# Altium PCB Mixer_Loaded.PCBDOC (part 1 of 2)
Units mil, origin at the board's own origin, x right, y up, seen from the top; angles counter-clockwise.
Board outline 16350 x 11350 mil, 2 copper layers (Top Layer, Bottom Layer); 554 components, 386 nets, 1551 pads, 0 vias.
Unrouted connection lines stored in the file: 1047.
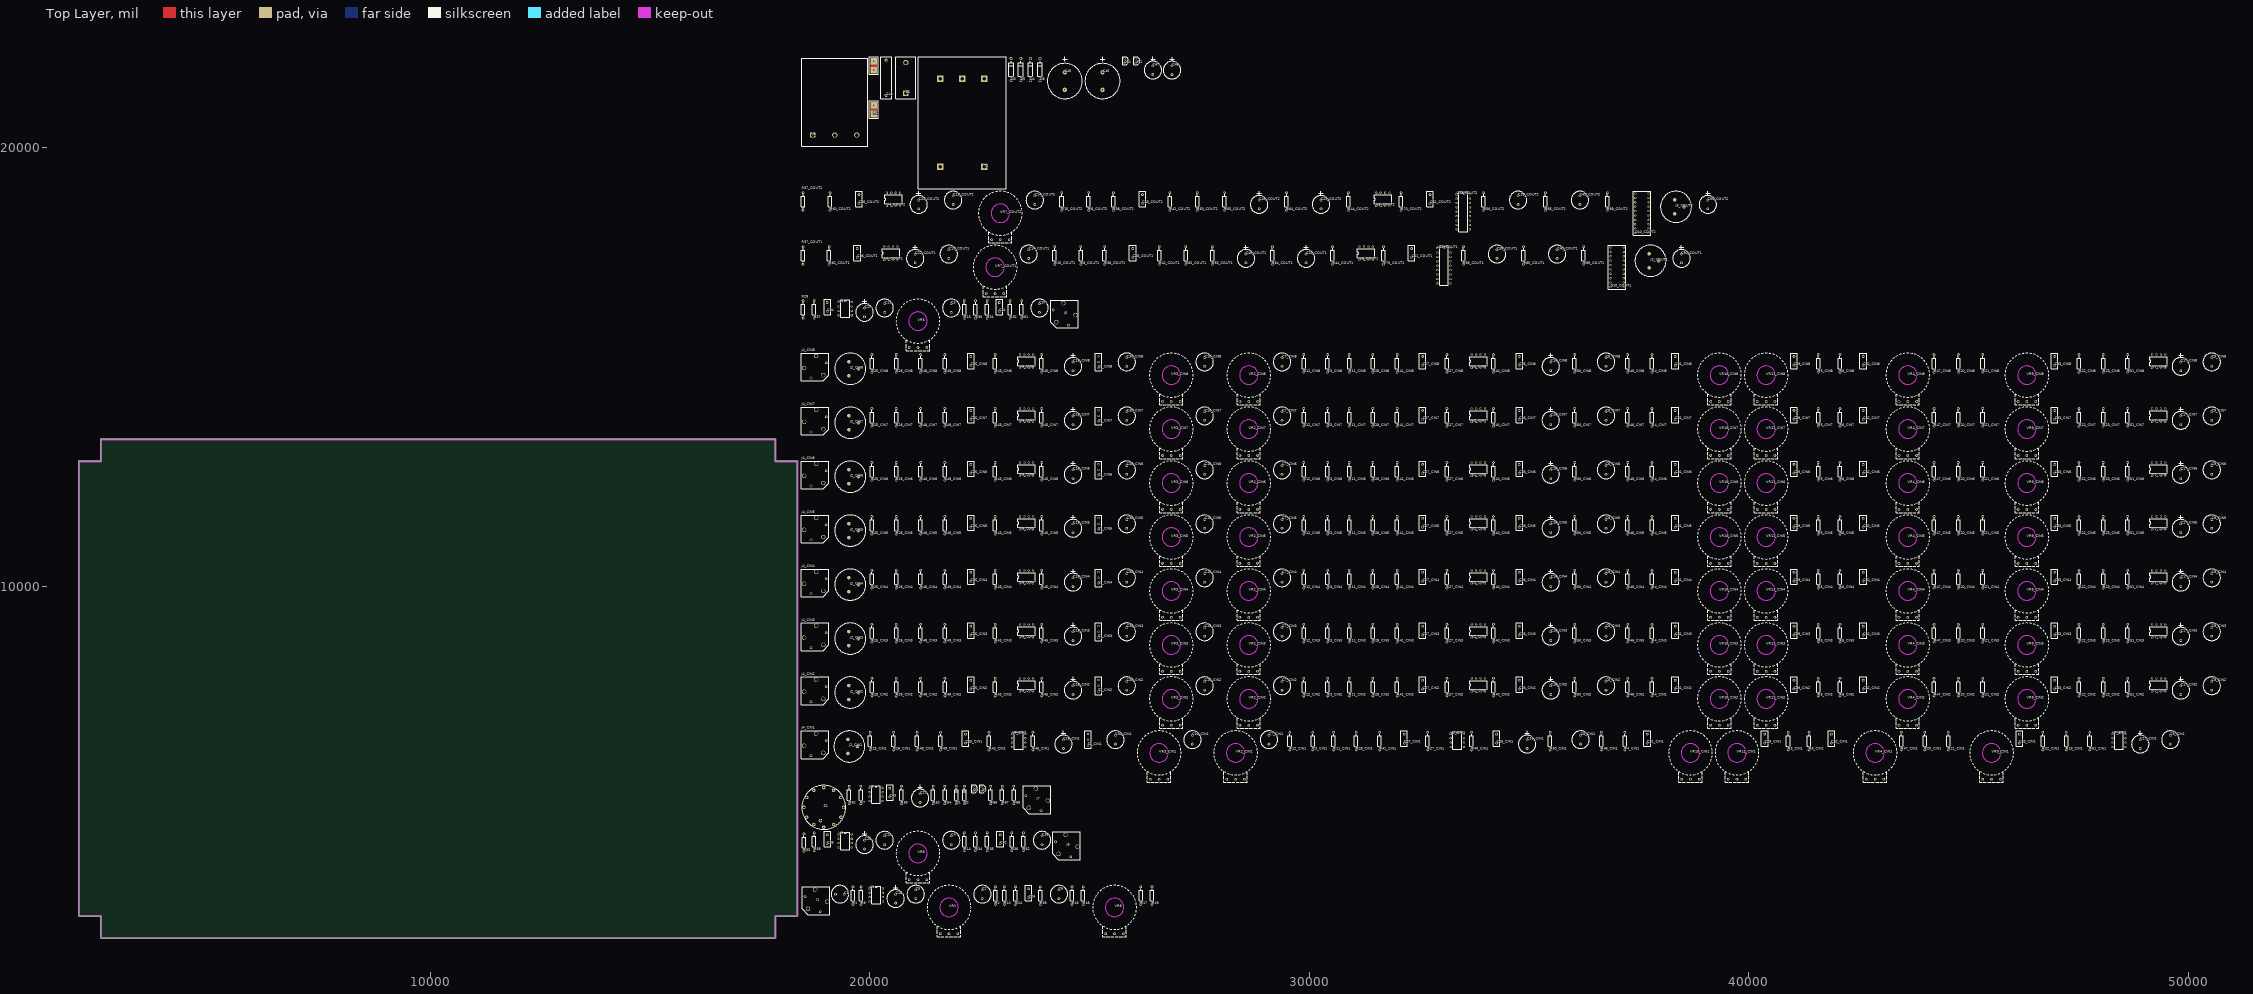
[diagram p0: Top Layer view]
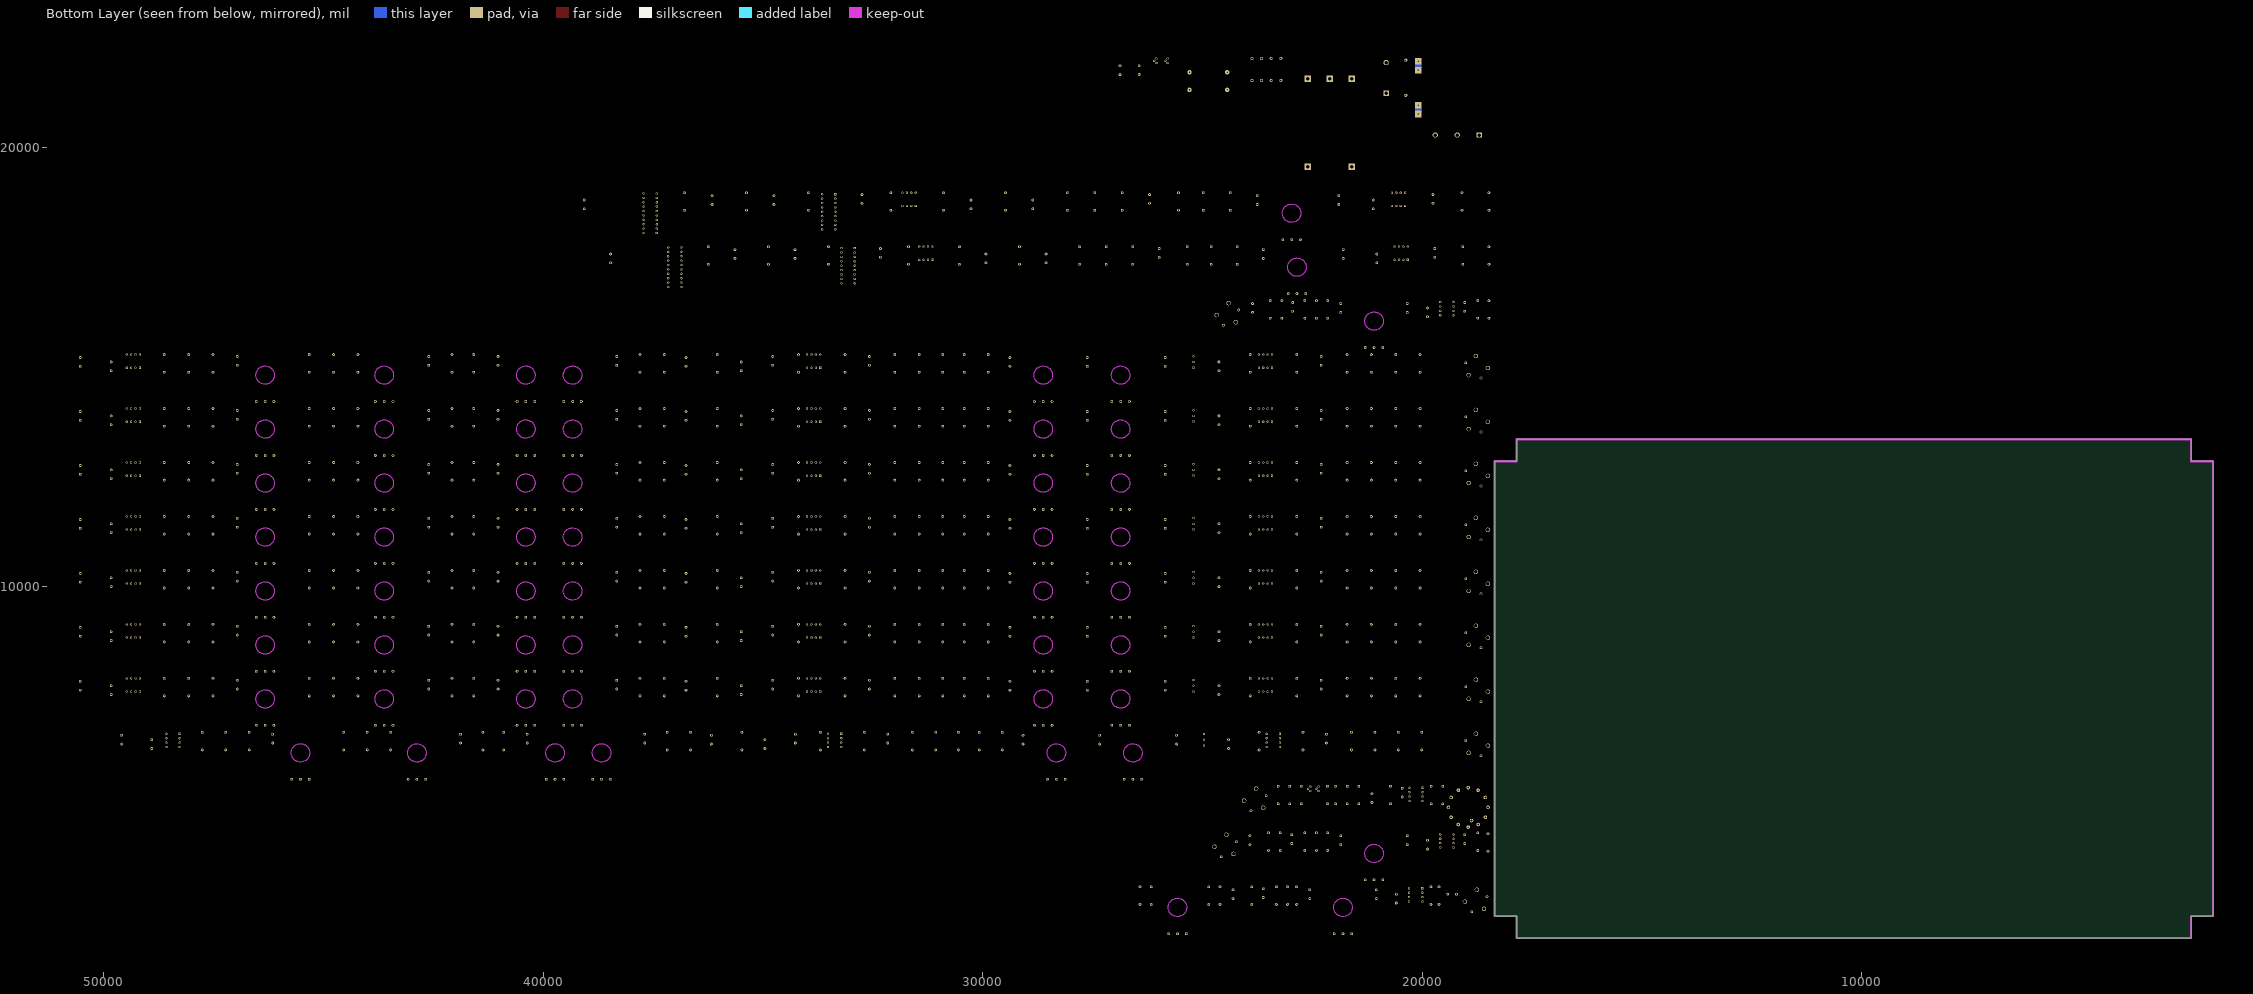
[diagram p1: Bottom Layer view, seen from below]

## Layer stack, top to bottom
Top Layer: signal copper 1.4
Dielectric: dielectric 12.6, FR-4, Dk 4.8
Bottom Layer: signal copper 1.4

## Board outline
2500,2000 17850,2000 17850,2500 18350,2500 18350,12850 17850,12850 17850,13350 2500,13350 2500,12850 2000,12850 2000,2500 2500,2500

## Design rules (kind name [scope] priority, off if disabled: settings)
Clearance [All] p1: gap=10
FabricationTestPointUsage TestPointUsage [All] p1: valid=0 allowmultiple=FALSE
FabricationTestpoint Testpoint [All] p1: side=3 testpointundercomponent=TRUE minsize=40 maxsize=100 preferedsize=60 minholesize=0 maxholesize=40 preferedholesize=32 testpointgrid=1 allowsidetop=TRUE allowsidebottom=TRUE usegrid=TRUE gridtolerance=0.01
PolygonConnect [All] p1: connectstyle=Relief reliefconductorwidth=10 reliefentries=4 polygonreliefangle="90 Angle"
RoomDefinition Auxilary [InComponentClass('Auxilary')] p1: confinementstyle=ConfineIn formatcopy=TRUE lockcomponents=FALSE outline 18425,2025 26579.51,2025 26579.51,3203 18425,3203
RoomDefinition CIN1 [InComponentClass('CIN1')] p2: confinementstyle=ConfineIn formatcopy=TRUE lockcomponents=FALSE outline 18425,5541 49972.36,5541 49972.36,6719 18425,6719
RoomDefinition CIN2 [InComponentClass('CIN2')] p3: confinementstyle=ConfineIn formatcopy=TRUE lockcomponents=FALSE outline 18425,6769 50934.91,6769 50934.91,7947 18425,7947
RoomDefinition CIN3 [InComponentClass('CIN3')] p4: confinementstyle=ConfineIn formatcopy=TRUE lockcomponents=FALSE outline 18425,7997 50934.91,7997 50934.91,9175 18425,9175
RoomDefinition CIN4 [InComponentClass('CIN4')] p5: confinementstyle=ConfineIn formatcopy=TRUE lockcomponents=FALSE outline 18425,9225 50934.91,9225 50934.91,10403 18425,10403
RoomDefinition CIN5 [InComponentClass('CIN5')] p6: confinementstyle=ConfineIn formatcopy=TRUE lockcomponents=FALSE outline 18425,10453 50934.91,10453 50934.91,11631 18425,11631
RoomDefinition CIN6 [InComponentClass('CIN6')] p7: confinementstyle=ConfineIn formatcopy=TRUE lockcomponents=FALSE outline 18425,11681 50934.91,11681 50934.91,12859 18425,12859
RoomDefinition CIN7 [InComponentClass('CIN7')] p8: confinementstyle=ConfineIn formatcopy=TRUE lockcomponents=FALSE outline 18425,12909 50934.91,12909 50934.91,14087 18425,14087
RoomDefinition CIN8 [InComponentClass('CIN8')] p9: confinementstyle=ConfineIn formatcopy=TRUE lockcomponents=FALSE outline 18425,14137 50934.91,14137 50934.91,15315 18425,15315
RoomDefinition COUT1 [InComponentClass('COUT1')] p10: confinementstyle=ConfineIn formatcopy=TRUE lockcomponents=FALSE outline 18425,16593 38977.41,16593 38977.41,17771 18425,17771
RoomDefinition COUT2 [InComponentClass('COUT2')] p11: confinementstyle=ConfineIn formatcopy=TRUE lockcomponents=FALSE outline 18425,17821 39597.21,17821 39597.21,18999 18425,18999
RoomDefinition Effects [InComponentClass('Effects')] p12: confinementstyle=ConfineIn formatcopy=TRUE lockcomponents=FALSE outline 18425,3253 24810.54,3253 24810.54,4431 18425,4431
RoomDefinition Headphone [InComponentClass('Headphone')] p13: confinementstyle=ConfineIn formatcopy=TRUE lockcomponents=FALSE outline 18425,4450 24133.46,4450 24133.46,5491 18425,5491
RoomDefinition Monitor [InComponentClass('Monitor')] p14: confinementstyle=ConfineIn formatcopy=TRUE lockcomponents=FALSE outline 18425,15365 24750.56,15365 24750.56,16543 18425,16543
RoomDefinition Power [InComponentClass('Power')] p15: confinementstyle=ConfineIn formatcopy=TRUE lockcomponents=FALSE outline 18425,19049 27101.73,19049 27101.73,22057 18425,22057
RoutingVias [All] p1: holewidth=28 width=50 viastyle="Through Hole" minholewidth=28 minwidth=50 maxholewidth=28 maxwidth=50
SilkscreenOverComponentPads [All] p1: minsilkscreentomaskgap=10
SolderMaskExpansion [All] p1: expansion=4
Width [All] p1: maxlimit=20 minlimit=8 preferedwidth=10
25 further rules are at their usual default settings.

## Classes and differential pairs
component class Auxilary: C1 C2 C5 C6 C15 C24 J1 R1 R2 R9 R10 R16 R17 R18 R19 R24 R39 U1 VR1 VR8
component class CIN1: C7_CIN1 C8_CIN1 C9_CIN1 C10_CIN1 C16_CIN1 C17_CIN1 C18_CIN1 C25_CIN1 C26_CIN1 C27_CIN1 C29_CIN1 C30_CIN1 C31_CIN1 C32_CIN1 C33_CIN1 J2_CIN1 J4_CIN1 R3_CIN1 R4_CIN1 R5_CIN1 R6_CIN1 R11_CIN1 R12_CIN1 R20_CIN1 R21_CIN1 R22_CIN1 R23_CIN1 R25_CIN1 R26_CIN1 R27_CIN1 R28_CIN1 R40_CIN1 R41_CIN1 R43_CIN1 R45_CIN1 R46_CIN1 R47_CIN1 R48_CIN1 R49_CIN1 R50_CIN1 R51_CIN1 S1_CIN1 U2_CIN1 U6_CIN1 U7_CIN1 VR2_CIN1 VR3_CIN1 VR4_CIN1 VR9_CIN1 VR10_CIN1 VR11_CIN1
component class CIN2: C7_CIN2 C8_CIN2 C9_CIN2 C10_CIN2 C16_CIN2 C17_CIN2 C18_CIN2 C25_CIN2 C26_CIN2 C27_CIN2 C29_CIN2 C30_CIN2 C31_CIN2 C32_CIN2 C33_CIN2 J2_CIN2 J4_CIN2 R3_CIN2 R4_CIN2 R5_CIN2 R6_CIN2 R11_CIN2 R12_CIN2 R20_CIN2 R21_CIN2 R22_CIN2 R23_CIN2 R25_CIN2 R26_CIN2 R27_CIN2 R28_CIN2 R40_CIN2 R41_CIN2 R43_CIN2 R45_CIN2 R46_CIN2 R47_CIN2 R48_CIN2 R49_CIN2 R50_CIN2 R51_CIN2 S1_CIN2 U2_CIN2 U6_CIN2 U7_CIN2 VR2_CIN2 VR3_CIN2 VR4_CIN2 VR9_CIN2 VR10_CIN2 VR11_CIN2
component class CIN3: C7_CIN3 C8_CIN3 C9_CIN3 C10_CIN3 C16_CIN3 C17_CIN3 C18_CIN3 C25_CIN3 C26_CIN3 C27_CIN3 C29_CIN3 C30_CIN3 C31_CIN3 C32_CIN3 C33_CIN3 J2_CIN3 J4_CIN3 R3_CIN3 R4_CIN3 R5_CIN3 R6_CIN3 R11_CIN3 R12_CIN3 R20_CIN3 R21_CIN3 R22_CIN3 R23_CIN3 R25_CIN3 R26_CIN3 R27_CIN3 R28_CIN3 R40_CIN3 R41_CIN3 R43_CIN3 R45_CIN3 R46_CIN3 R47_CIN3 R48_CIN3 R49_CIN3 R50_CIN3 R51_CIN3 S1_CIN3 U2_CIN3 U6_CIN3 U7_CIN3 VR2_CIN3 VR3_CIN3 VR4_CIN3 VR9_CIN3 VR10_CIN3 VR11_CIN3
component class CIN4: C7_CIN4 C8_CIN4 C9_CIN4 C10_CIN4 C16_CIN4 C17_CIN4 C18_CIN4 C25_CIN4 C26_CIN4 C27_CIN4 C29_CIN4 C30_CIN4 C31_CIN4 C32_CIN4 C33_CIN4 J2_CIN4 J4_CIN4 R3_CIN4 R4_CIN4 R5_CIN4 R6_CIN4 R11_CIN4 R12_CIN4 R20_CIN4 R21_CIN4 R22_CIN4 R23_CIN4 R25_CIN4 R26_CIN4 R27_CIN4 R28_CIN4 R40_CIN4 R41_CIN4 R43_CIN4 R45_CIN4 R46_CIN4 R47_CIN4 R48_CIN4 R49_CIN4 R50_CIN4 R51_CIN4 S1_CIN4 U2_CIN4 U6_CIN4 U7_CIN4 VR2_CIN4 VR3_CIN4 VR4_CIN4 VR9_CIN4 VR10_CIN4 VR11_CIN4
component class CIN5: C7_CIN5 C8_CIN5 C9_CIN5 C10_CIN5 C16_CIN5 C17_CIN5 C18_CIN5 C25_CIN5 C26_CIN5 C27_CIN5 C29_CIN5 C30_CIN5 C31_CIN5 C32_CIN5 C33_CIN5 J2_CIN5 J4_CIN5 R3_CIN5 R4_CIN5 R5_CIN5 R6_CIN5 R11_CIN5 R12_CIN5 R20_CIN5 R21_CIN5 R22_CIN5 R23_CIN5 R25_CIN5 R26_CIN5 R27_CIN5 R28_CIN5 R40_CIN5 R41_CIN5 R43_CIN5 R45_CIN5 R46_CIN5 R47_CIN5 R48_CIN5 R49_CIN5 R50_CIN5 R51_CIN5 S1_CIN5 U2_CIN5 U6_CIN5 U7_CIN5 VR2_CIN5 VR3_CIN5 VR4_CIN5 VR9_CIN5 VR10_CIN5 VR11_CIN5
component class CIN6: C7_CIN6 C8_CIN6 C9_CIN6 C10_CIN6 C16_CIN6 C17_CIN6 C18_CIN6 C25_CIN6 C26_CIN6 C27_CIN6 C29_CIN6 C30_CIN6 C31_CIN6 C32_CIN6 C33_CIN6 J2_CIN6 J4_CIN6 R3_CIN6 R4_CIN6 R5_CIN6 R6_CIN6 R11_CIN6 R12_CIN6 R20_CIN6 R21_CIN6 R22_CIN6 R23_CIN6 R25_CIN6 R26_CIN6 R27_CIN6 R28_CIN6 R40_CIN6 R41_CIN6 R43_CIN6 R45_CIN6 R46_CIN6 R47_CIN6 R48_CIN6 R49_CIN6 R50_CIN6 R51_CIN6 S1_CIN6 U2_CIN6 U6_CIN6 U7_CIN6 VR2_CIN6 VR3_CIN6 VR4_CIN6 VR9_CIN6 VR10_CIN6 VR11_CIN6
component class CIN7: C7_CIN7 C8_CIN7 C9_CIN7 C10_CIN7 C16_CIN7 C17_CIN7 C18_CIN7 C25_CIN7 C26_CIN7 C27_CIN7 C29_CIN7 C30_CIN7 C31_CIN7 C32_CIN7 C33_CIN7 J2_CIN7 J4_CIN7 R3_CIN7 R4_CIN7 R5_CIN7 R6_CIN7 R11_CIN7 R12_CIN7 R20_CIN7 R21_CIN7 R22_CIN7 R23_CIN7 R25_CIN7 R26_CIN7 R27_CIN7 R28_CIN7 R40_CIN7 R41_CIN7 R43_CIN7 R45_CIN7 R46_CIN7 R47_CIN7 R48_CIN7 R49_CIN7 R50_CIN7 R51_CIN7 S1_CIN7 U2_CIN7 U6_CIN7 U7_CIN7 VR2_CIN7 VR3_CIN7 VR4_CIN7 VR9_CIN7 VR10_CIN7 VR11_CIN7
component class CIN8: C7_CIN8 C8_CIN8 C9_CIN8 C10_CIN8 C16_CIN8 C17_CIN8 C18_CIN8 C25_CIN8 C26_CIN8 C27_CIN8 C29_CIN8 C30_CIN8 C31_CIN8 C32_CIN8 C33_CIN8 J2_CIN8 J4_CIN8 R3_CIN8 R4_CIN8 R5_CIN8 R6_CIN8 R11_CIN8 R12_CIN8 R20_CIN8 R21_CIN8 R22_CIN8 R23_CIN8 R25_CIN8 R26_CIN8 R27_CIN8 R28_CIN8 R40_CIN8 R41_CIN8 R43_CIN8 R45_CIN8 R46_CIN8 R47_CIN8 R48_CIN8 R49_CIN8 R50_CIN8 R51_CIN8 S1_CIN8 U2_CIN8 U6_CIN8 U7_CIN8 VR2_CIN8 VR3_CIN8 VR4_CIN8 VR9_CIN8 VR10_CIN8 VR11_CIN8
component class COUT1: C13_COUT1 C14_COUT1 C22_COUT1 C23_COUT1 C28_COUT1 C36_COUT1 C39_COUT1 C40_COUT1 C49_COUT1 C50_COUT1 C51_COUT1 D10_COUT1 J3_COUT1 R8_COUT1 R15_COUT1 R37_COUT1 R38_COUT1 R42_COUT1 R44_COUT1 R55_COUT1 R56_COUT1 R60_COUT1 R63_COUT1 R64_COUT1 R65_COUT1 R69_COUT1 R70_COUT1 U4_COUT1 U5_COUT1 U12_COUT1 VR7_COUT1
component class COUT2: C13_COUT2 C14_COUT2 C22_COUT2 C23_COUT2 C28_COUT2 C36_COUT2 C39_COUT2 C40_COUT2 C49_COUT2 C50_COUT2 C51_COUT2 D10_COUT2 J3_COUT2 R8_COUT2 R15_COUT2 R37_COUT2 R38_COUT2 R42_COUT2 R44_COUT2 R55_COUT2 R56_COUT2 R60_COUT2 R63_COUT2 R64_COUT2 R65_COUT2 R69_COUT2 R70_COUT2 U4_COUT2 U5_COUT2 U12_COUT2 VR7_COUT2
component class Effects: C4 C12 C20 C35 C38 C42 J6 R14 R33 R34 R35 R36 R58 R62 U3 VR6
component class Headphone: C21 C43 D1 D2 J7 Q1 Q2 R7 R52 R53 R54 R59 R66 R67 R68 S2 U9
component class Monitor: C3 C11 C19 C34 C37 C41 J5 R13 R29 R30 R31 R32 R57 R61 U8 VR5
component class Power: C44 C45 C46 C47 C48 D3 D4 D5 D6 F1 J8 S3 T1 U10 U11
net class HEADPHONE[1..8]: HEADPHONE1 HEADPHONE2 HEADPHONE3 HEADPHONE4 HEADPHONE5 HEADPHONE6 HEADPHONE7 HEADPHONE8
net class MB[1..2]: MB1 MB2
channel class "Input channel": CIN1 CIN2 CIN3 CIN4 CIN5 CIN6 CIN7 CIN8
channel class "Output channel": COUT1 COUT2

## Components (designator, comment, footprint, x,y, rotation, side; value= is the part's Value field where it differs from the comment)
C1 "1uF" RB.2/.4-NP 19417,2999 r0 top
C2 "1uF" RB.2/.4-NP 22558.94,3099 r90 top
C3 "1uF" RB.2/.4-NP 21851.84,16439 r90 top
C4 "1uF" RB.2/.4-NP 21851.84,4327 r90 top
C5 "2.2uF" RB.2/.4-NP 21042.94,3099 r90 top
C6 "2.2uF" RB.2/.4-NP 24301.71,3099 r90 top
C7_CIN1 "2.2uF" RB.2/.4-NP 29080.47,6615 r90 top (schematic designator C7)
C7_CIN2 "2.2uF" RB.2/.4-NP 29379.38,7843 r90 top (schematic designator C7)
C7_CIN3 "2.2uF" RB.2/.4-NP 29379.38,9071 r90 top (schematic designator C7)
C7_CIN4 "2.2uF" RB.2/.4-NP 29379.38,10299 r90 top (schematic designator C7)
C7_CIN5 "2.2uF" RB.2/.4-NP 29379.38,11527 r90 top (schematic designator C7)
C7_CIN6 "2.2uF" RB.2/.4-NP 29379.38,12755 r90 top (schematic designator C7)
C7_CIN7 "2.2uF" RB.2/.4-NP 29379.38,13983 r90 top (schematic designator C7)
C7_CIN8 "2.2uF" RB.2/.4-NP 29379.38,15211 r90 top (schematic designator C7)
C8_CIN1 "2.2uF" RB.2/.4-NP 36172.73,6615 r90 top (schematic designator C8)
C8_CIN2 "2.2uF" RB.2/.4-NP 36750.56,7843 r90 top (schematic designator C8)
C8_CIN3 "2.2uF" RB.2/.4-NP 36750.56,9071 r90 top (schematic designator C8)
C8_CIN4 "2.2uF" RB.2/.4-NP 36750.56,10299 r90 top (schematic designator C8)
C8_CIN5 "2.2uF" RB.2/.4-NP 36750.56,11527 r90 top (schematic designator C8)
C8_CIN6 "2.2uF" RB.2/.4-NP 36750.56,12755 r90 top (schematic designator C8)
C8_CIN7 "2.2uF" RB.2/.4-NP 36750.56,13983 r90 top (schematic designator C8)
C8_CIN8 "2.2uF" RB.2/.4-NP 36750.56,15211 r90 top (schematic designator C8)
C9_CIN1 "2.2uF" RB.2/.4-NP 49592.48,6615 r90 top (schematic designator C9)
C9_CIN2 "2.2uF" RB.2/.4-NP 50535.03,7843 r90 top (schematic designator C9)
C9_CIN3 "2.2uF" RB.2/.4-NP 50535.03,9071 r90 top (schematic designator C9)
C9_CIN4 "2.2uF" RB.2/.4-NP 50535.03,10299 r90 top (schematic designator C9)
C9_CIN5 "2.2uF" RB.2/.4-NP 50535.03,11527 r90 top (schematic designator C9)
C9_CIN6 "2.2uF" RB.2/.4-NP 50535.03,12755 r90 top (schematic designator C9)
C9_CIN7 "2.2uF" RB.2/.4-NP 50535.03,13983 r90 top (schematic designator C9)
C9_CIN8 "2.2uF" RB.2/.4-NP 50535.03,15211 r90 top (schematic designator C9)
C10_CIN1 "2.2uF" RB.2/.4-NP 27338.6,6615 r90 top (schematic designator C10)
C10_CIN2 "2.2uF" RB.2/.4-NP 27617.52,7843 r90 top (schematic designator C10)
C10_CIN3 "2.2uF" RB.2/.4-NP 27617.52,9071 r90 top (schematic designator C10)
C10_CIN4 "2.2uF" RB.2/.4-NP 27617.52,10299 r90 top (schematic designator C10)
C10_CIN5 "2.2uF" RB.2/.4-NP 27617.52,11527 r90 top (schematic designator C10)
C10_CIN6 "2.2uF" RB.2/.4-NP 27617.52,12755 r90 top (schematic designator C10)
C10_CIN7 "2.2uF" RB.2/.4-NP 27617.52,13983 r90 top (schematic designator C10)
C10_CIN8 "2.2uF" RB.2/.4-NP 27617.52,15211 r90 top (schematic designator C10)
C11 "2.2uF" RB.2/.4-NP 20335.84,16439 r90 top
C12 "2.2uF" RB.2/.4-NP 20335.84,4327 r90 top
C13_COUT1 "2.2uF" RB.2/.4-NP 21794.21,17667 r90 top (schematic designator C13)
C13_COUT2 "2.2uF" RB.2/.4-NP 21894.18,18895 r90 top (schematic designator C13)
C14_COUT1 "2.2uF" RB.2/.4-NP 23611.89,17667 r90 top (schematic designator C14)
C14_COUT2 "2.2uF" RB.2/.4-NP 23751.85,18895 r90 top (schematic designator C14)
C15 "10uF" RB.2/.4 20584.94,2999 r90 top
C16_CIN1 "10uF" RB.2/.4 34955.01,6515 r90 top (schematic designator C16)
C16_CIN2 "10uF" RB.2/.4 35492.85,7743 r90 top (schematic designator C16)
C16_CIN3 "10uF" RB.2/.4 35492.85,8971 r90 top (schematic designator C16)
C16_CIN4 "10uF" RB.2/.4 35492.85,10199 r90 top (schematic designator C16)
C16_CIN5 "10uF" RB.2/.4 35492.85,11427 r90 top (schematic designator C16)
C16_CIN6 "10uF" RB.2/.4 35492.85,12655 r90 top (schematic designator C16)
C16_CIN7 "10uF" RB.2/.4 35492.85,13883 r90 top (schematic designator C16)
C16_CIN8 "10uF" RB.2/.4 35492.85,15111 r90 top (schematic designator C16)
C17_CIN1 "10uF" RB.2/.4 48908.61,6515 r90 top (schematic designator C17)
C17_CIN2 "10uF" RB.2/.4 49831.18,7743 r90 top (schematic designator C17)
C17_CIN3 "10uF" RB.2/.4 49831.18,8971 r90 top (schematic designator C17)
C17_CIN4 "10uF" RB.2/.4 49831.18,10199 r90 top (schematic designator C17)
C17_CIN5 "10uF" RB.2/.4 49831.18,11427 r90 top (schematic designator C17)
C17_CIN6 "10uF" RB.2/.4 49831.18,12655 r90 top (schematic designator C17)
C17_CIN7 "10uF" RB.2/.4 49831.18,13883 r90 top (schematic designator C17)
C17_CIN8 "10uF" RB.2/.4 49831.18,15111 r90 top (schematic designator C17)
C18_CIN1 "10uF" RB.2/.4 24404,6515 r90 top (schematic designator C18)
C18_CIN2 "10uF" RB.2/.4 24622.93,7743 r90 top (schematic designator C18)
C18_CIN3 "10uF" RB.2/.4 24622.93,8971 r90 top (schematic designator C18)
C18_CIN4 "10uF" RB.2/.4 24622.93,10199 r90 top (schematic designator C18)
C18_CIN5 "10uF" RB.2/.4 24622.93,11427 r90 top (schematic designator C18)
C18_CIN6 "10uF" RB.2/.4 24622.93,12655 r90 top (schematic designator C18)
C18_CIN7 "10uF" RB.2/.4 24622.93,13883 r90 top (schematic designator C18)
C18_CIN8 "10uF" RB.2/.4 24622.93,15111 r90 top (schematic designator C18)
C19 "10uF" RB.2/.4 19877.84,16339 r90 top
C20 "10uF" RB.2/.4 19877.84,4227 r90 top
C21 "10uF" RB.2/.4 21141.81,5287 r90 top
C22_COUT1 "10uF" RB.2/.4 21030.37,17567 r90 top (schematic designator C22)
C22_COUT2 "10uF" RB.2/.4 21110.35,18795 r90 top (schematic designator C22)
C23_COUT1 "10uF" RB.2/.4 29925.3,17567 r90 top (schematic designator C23)
C23_COUT2 "10uF" RB.2/.4 30265.19,18795 r90 top (schematic designator C23)
C24 "270pF" RAD0.2 23613.81,2924 r90 top
C25_CIN1 "270pF" RAD0.2 22176.53,6440 r90 top (schematic designator C25)
C25_CIN2 "270pF" RAD0.2 22296.5,7668 r90 top (schematic designator C25)
C25_CIN3 "270pF" RAD0.2 22296.5,8896 r90 top (schematic designator C25)
C25_CIN4 "270pF" RAD0.2 22296.5,10124 r90 top (schematic designator C25)
C25_CIN5 "270pF" RAD0.2 22296.5,11352 r90 top (schematic designator C25)
C25_CIN6 "270pF" RAD0.2 22296.5,12580 r90 top (schematic designator C25)
C25_CIN7 "270pF" RAD0.2 22296.5,13808 r90 top (schematic designator C25)
C25_CIN8 "270pF" RAD0.2 22296.5,15036 r90 top (schematic designator C25)
C26_CIN1 "270pF" RAD0.2 34261.15,6440 r90 top (schematic designator C26)
C26_CIN2 "270pF" RAD0.2 34778.99,7668 r90 top (schematic designator C26)
C26_CIN3 "270pF" RAD0.2 34778.99,8896 r90 top (schematic designator C26)
C26_CIN4 "270pF" RAD0.2 34778.99,10124 r90 top (schematic designator C26)
C26_CIN5 "270pF" RAD0.2 34778.99,11352 r90 top (schematic designator C26)
C26_CIN6 "270pF" RAD0.2 34778.99,12580 r90 top (schematic designator C26)
C26_CIN7 "270pF" RAD0.2 34778.99,13808 r90 top (schematic designator C26)
C26_CIN8 "270pF" RAD0.2 34778.99,15036 r90 top (schematic designator C26)
C27_CIN1 "270pF" RAD0.2 32158.69,6440 r90 top (schematic designator C27)
C27_CIN2 "270pF" RAD0.2 32577.56,7668 r90 top (schematic designator C27)
C27_CIN3 "270pF" RAD0.2 32577.56,8896 r90 top (schematic designator C27)
C27_CIN4 "270pF" RAD0.2 32577.56,10124 r90 top (schematic designator C27)
C27_CIN5 "270pF" RAD0.2 32577.56,11352 r90 top (schematic designator C27)
C27_CIN6 "270pF" RAD0.2 32577.56,12580 r90 top (schematic designator C27)
C27_CIN7 "270pF" RAD0.2 32577.56,13808 r90 top (schematic designator C27)
C27_CIN8 "270pF" RAD0.2 32577.56,15036 r90 top (schematic designator C27)
C28_COUT1 "270pF" RAD0.2 25982.27,17492 r90 top (schematic designator C28)
C28_COUT2 "270pF" RAD0.2 26202.2,18720 r90 top (schematic designator C28)
C29_CIN1 "100nF" RAD0.2 40364.22,6440 r90 top (schematic designator C29)
C29_CIN2 "100nF" RAD0.2 41027.86,7668 r90 top (schematic designator C29)
C29_CIN3 "100nF" RAD0.2 41027.86,8896 r90 top (schematic designator C29)
C29_CIN4 "100nF" RAD0.2 41027.86,10124 r90 top (schematic designator C29)
C29_CIN5 "100nF" RAD0.2 41027.86,11352 r90 top (schematic designator C29)
C29_CIN6 "100nF" RAD0.2 41027.86,12580 r90 top (schematic designator C29)
C29_CIN7 "100nF" RAD0.2 41027.86,13808 r90 top (schematic designator C29)
C29_CIN8 "100nF" RAD0.2 41027.86,15036 r90 top (schematic designator C29)
C30_CIN1 "6.8uF" RB.2/.4-NP 25586.74,6615 r90 top (schematic designator C30)
C30_CIN2 "6.8uF" RB.2/.4-NP 25845.67,7843 r90 top (schematic designator C30)
C30_CIN3 "6.8uF" RB.2/.4-NP 25845.67,9071 r90 top (schematic designator C30)
C30_CIN4 "6.8uF" RB.2/.4-NP 25845.67,10299 r90 top (schematic designator C30)
C30_CIN5 "6.8uF" RB.2/.4-NP 25845.67,11527 r90 top (schematic designator C30)
C30_CIN6 "6.8uF" RB.2/.4-NP 25845.67,12755 r90 top (schematic designator C30)
C30_CIN7 "6.8uF" RB.2/.4-NP 25845.67,13983 r90 top (schematic designator C30)
C30_CIN8 "6.8uF" RB.2/.4-NP 25845.67,15211 r90 top (schematic designator C30)
C31_CIN1 "4.7nF" RAD0.2 37689.35,6440 r90 top (schematic designator C31)
C31_CIN2 "4.7nF" RAD0.2 38327.16,7668 r90 top (schematic designator C31)
C31_CIN3 "4.7nF" RAD0.2 38327.16,8896 r90 top (schematic designator C31)
C31_CIN4 "4.7nF" RAD0.2 38327.16,10124 r90 top (schematic designator C31)
C31_CIN5 "4.7nF" RAD0.2 38327.16,11352 r90 top (schematic designator C31)
C31_CIN6 "4.7nF" RAD0.2 38327.16,12580 r90 top (schematic designator C31)
C31_CIN7 "4.7nF" RAD0.2 38327.16,13808 r90 top (schematic designator C31)
C31_CIN8 "4.7nF" RAD0.2 38327.16,15036 r90 top (schematic designator C31)
C32_CIN1 "4.7nF" RAD0.2 41880.84,6440 r90 top (schematic designator C32)
C32_CIN2 "4.7nF" RAD0.2 42604.46,7668 r90 top (schematic designator C32)
C32_CIN3 "4.7nF" RAD0.2 42604.46,8896 r90 top (schematic designator C32)
C32_CIN4 "4.7nF" RAD0.2 42604.46,10124 r90 top (schematic designator C32)
C32_CIN5 "4.7nF" RAD0.2 42604.46,11352 r90 top (schematic designator C32)
C32_CIN6 "4.7nF" RAD0.2 42604.46,12580 r90 top (schematic designator C32)
C32_CIN7 "4.7nF" RAD0.2 42604.46,13808 r90 top (schematic designator C32)
C32_CIN8 "4.7nF" RAD0.2 42604.46,15036 r90 top (schematic designator C32)
C33_CIN1 "10pF" RAD0.2 46157.29,6440 r90 top (schematic designator C33)
C33_CIN2 "10pF" RAD0.2 46960.88,7668 r90 top (schematic designator C33)
C33_CIN3 "10pF" RAD0.2 46960.88,8896 r90 top (schematic designator C33)
C33_CIN4 "10pF" RAD0.2 46960.88,10124 r90 top (schematic designator C33)
C33_CIN5 "10pF" RAD0.2 46960.88,11352 r90 top (schematic designator C33)
C33_CIN6 "10pF" RAD0.2 46960.88,12580 r90 top (schematic designator C33)
C33_CIN7 "10pF" RAD0.2 46960.88,13808 r90 top (schematic designator C33)
C33_CIN8 "10pF" RAD0.2 46960.88,15036 r90 top (schematic designator C33)
C34 "27pF" RAD0.2 19031.9,16264 r90 top
C35 "27pF" RAD0.2 19031.9,4152 r90 top
C36_COUT1 "27pF" RAD0.2 19711.68,17492 r90 top (schematic designator C36)
C36_COUT2 "27pF" RAD0.2 19751.66,18720 r90 top (schematic designator C36)
C37 "47uF" RB.2/.4-NP 23858.56,16439 r90 top
C38 "47uF" RB.2/.4-NP 23918.54,4327 r90 top
C39_COUT1 "47uF" RB.2/.4-NP 34270.19,17667 r90 top (schematic designator C39)
C39_COUT2 "47uF" RB.2/.4-NP 34750.04,18895 r90 top (schematic designator C39)
C40_COUT1 "47uF" RB.2/.4-NP 35637.87,17667 r90 top (schematic designator C40)
C40_COUT2 "47uF" RB.2/.4-NP 36157.7,18895 r90 top (schematic designator C40)
C41 "1nF" RAD0.2 22946.7,16264 r90 top
C42 "1nF" RAD0.2 22966.69,4152 r90 top
C43 "22pF" RAD0.2 20453.92,5212 r90 top
C44 "1nF / 2kV" RAD0.8 20370,21178 r90 top
C45 "1000uF" RB.4/.8 24435.82,21703 r90 top
C46 "1000uF" RB.4/.8 25293.82,21703 r90 top
C47 "10uF" RB.2/.4 26439.73,21853 r90 top
C48 "10uF" RB.2/.4 26875,21850 r90 top
C49_COUT1 "10uF" RB.2/.4 28557.62,17567 r90 top (schematic designator C49)
C49_COUT2 "10uF" RB.2/.4 28857.53,18795 r90 top (schematic designator C49)
C50_COUT1 "100uF" RB.2/.4 38467.57,17567 r90 top (schematic designator C50)
C50_COUT2 "100uF" RB.2/.4 39067.38,18795 r90 top (schematic designator C50)
C51_COUT1 "180pF" RAD0.2 32326.67,17492 r90 top (schematic designator C51)
C51_COUT2 "180pF" RAD0.2 32746.54,18720 r90 top (schematic designator C51)
D1 "1N914" DIODE0.4 21967.71,5055 r90 top
D2 "1N914" DIODE0.4 22151.68,5055 r90 top
D3 "1N4004" DIODE0.5 23214.95,21517 r90 top
D4 "1N4004" DIODE0.5 23652.88,21517 r90 top
D5 "1N4004" DIODE0.5 23433.92,21517 r90 top
D6 "1N4004" DIODE0.5 23871.85,21517 r90 top
D10_COUT1 "LED-10 BAR" "LED - 10 BAR HORIZONTAL" 36855.54,16817 r0 top (schematic designator D10)
D10_COUT2 "LED-10 BAR" "LED - 10 BAR HORIZONTAL" 37415.36,18045 r0 top (schematic designator D10)
F1 "1A" FUSE 20087,20753 r90 top
J1 "Auxilary In" JACK-6.25MM 18775,2850 r0 top
J2_CIN1 "XLR" XLR-FEMALE 19532.21,6360.67 r90 top (schematic designator J2)
J2_CIN2 "XLR" XLR-FEMALE 19552.2,7588.67 r90 top (schematic designator J2)
J2_CIN3 "XLR" XLR-FEMALE 19552.2,8816.67 r90 top (schematic designator J2)
J2_CIN4 "XLR" XLR-FEMALE 19552.2,10044.67 r90 top (schematic designator J2)
J2_CIN5 "XLR" XLR-FEMALE 19552.2,11272.67 r90 top (schematic designator J2)
J2_CIN6 "XLR" XLR-FEMALE 19552.2,12500.67 r90 top (schematic designator J2)
J2_CIN7 "XLR" XLR-FEMALE 19552.2,13728.67 r90 top (schematic designator J2)
J2_CIN8 "XLR" XLR-FEMALE 19552.2,14956.67 r90 top (schematic designator J2)
J3_COUT1 "XLR" XLR-MALE 37763.72,17412.67 r90 top (schematic designator J3)
J3_COUT2 "XLR" XLR-MALE 38343.53,18640.67 r90 top (schematic designator J3)
J4_CIN1 "STEREO JACK" JACK-6.25MM 18754,6400 r90 top (schematic designator J4)
J4_CIN2 "STEREO JACK" JACK-6.25MM 18754,7628 r90 top (schematic designator J4)
J4_CIN3 "STEREO JACK" JACK-6.25MM 18754,8856 r90 top (schematic designator J4)
J4_CIN4 "STEREO JACK" JACK-6.25MM 18754,10084 r90 top (schematic designator J4)
J4_CIN5 "STEREO JACK" JACK-6.25MM 18754,11312 r90 top (schematic designator J4)
J4_CIN6 "STEREO JACK" JACK-6.25MM 18754,12540 r90 top (schematic designator J4)
J4_CIN7 "STEREO JACK" JACK-6.25MM 18754,13768 r90 top (schematic designator J4)
J4_CIN8 "STEREO JACK" JACK-6.25MM 18754,14996 r90 top (schematic designator J4)
J5 "Monitor Send" JACK-6.25MM 24425,16200 r0 top
J6 "Effects Send" JACK-6.25MM 24475,4100 r0 top
J7 "Headphone" JACK-6.25MM 23800,5150 r0 top
J8 "CON MAINS" IEC-MAINS 18700,20275 r0 top
Q1 "BC338-25" TO-92A 22355.65,5347 r90 top
Q2 "BC328-25" TO-92A 22543.65,5347 r90 top
R1 "22k" AXIAL0.4 19615,2767 r90 top
R2 "22k" AXIAL0.4 22856.94,2767 r90 top
R3_CIN1 "22k" AXIAL0.4 30078.21,6283 r90 top (schematic designator R3)
R3_CIN2 "22k" AXIAL0.4 30417.11,7511 r90 top (schematic designator R3)
R3_CIN3 "22k" AXIAL0.4 30417.11,8739 r90 top (schematic designator R3)
R3_CIN4 "22k" AXIAL0.4 30417.11,9967 r90 top (schematic designator R3)
R3_CIN5 "22k" AXIAL0.4 30417.11,11195 r90 top (schematic designator R3)
R3_CIN6 "22k" AXIAL0.4 30417.11,12423 r90 top (schematic designator R3)
R3_CIN7 "22k" AXIAL0.4 30417.11,13651 r90 top (schematic designator R3)
R3_CIN8 "22k" AXIAL0.4 30417.11,14879 r90 top (schematic designator R3)
R4_CIN1 "22k" AXIAL0.4 37180.47,6283 r90 top (schematic designator R4)
R4_CIN2 "22k" AXIAL0.4 37798.29,7511 r90 top (schematic designator R4)
R4_CIN3 "22k" AXIAL0.4 37798.29,8739 r90 top (schematic designator R4)
R4_CIN4 "22k" AXIAL0.4 37798.29,9967 r90 top (schematic designator R4)
R4_CIN5 "22k" AXIAL0.4 37798.29,11195 r90 top (schematic designator R4)
R4_CIN6 "22k" AXIAL0.4 37798.29,12423 r90 top (schematic designator R4)
R4_CIN7 "22k" AXIAL0.4 37798.29,13651 r90 top (schematic designator R4)
R4_CIN8 "22k" AXIAL0.4 37798.29,14879 r90 top (schematic designator R4)
R5_CIN1 "22k" AXIAL0.4 40898.08,6283 r90 top (schematic designator R5)
R5_CIN2 "22k" AXIAL0.4 41581.71,7511 r90 top (schematic designator R5)
R5_CIN3 "22k" AXIAL0.4 41581.71,8739 r90 top (schematic designator R5)
R5_CIN4 "22k" AXIAL0.4 41581.71,9967 r90 top (schematic designator R5)
R5_CIN5 "22k" AXIAL0.4 41581.71,11195 r90 top (schematic designator R5)
R5_CIN6 "22k" AXIAL0.4 41581.71,12423 r90 top (schematic designator R5)
R5_CIN7 "22k" AXIAL0.4 41581.71,13651 r90 top (schematic designator R5)
R5_CIN8 "22k" AXIAL0.4 41581.71,14879 r90 top (schematic designator R5)
R6_CIN1 "22k" AXIAL0.4 41371.96,6283 r90 top (schematic designator R6)
R6_CIN2 "22k" AXIAL0.4 42075.59,7511 r90 top (schematic designator R6)
R6_CIN3 "22k" AXIAL0.4 42075.59,8739 r90 top (schematic designator R6)
R6_CIN4 "22k" AXIAL0.4 42075.59,9967 r90 top (schematic designator R6)
R6_CIN5 "22k" AXIAL0.4 42075.59,11195 r90 top (schematic designator R6)
R6_CIN6 "22k" AXIAL0.4 42075.59,12423 r90 top (schematic designator R6)
R6_CIN7 "22k" AXIAL0.4 42075.59,13651 r90 top (schematic designator R6)
R6_CIN8 "22k" AXIAL0.4 42075.59,14879 r90 top (schematic designator R6)
R7 "22k" AXIAL0.4 19792.95,5055 r90 top
R8_COUT1 "22k" AXIAL0.4 24799.57,17335 r90 top (schematic designator R8)
R8_COUT2 "22k" AXIAL0.4 24979.52,18563 r90 top (schematic designator R8)
R9 "10R" AXIAL0.4 19798.97,2767 r90 top
R10 "10R" AXIAL0.4 23060.91,2767 r90 top
R11_CIN1 "10R" AXIAL0.4 30552.09,6283 r90 top (schematic designator R11)
R11_CIN2 "10R" AXIAL0.4 30910.98,7511 r90 top (schematic designator R11)
R11_CIN3 "10R" AXIAL0.4 30910.98,8739 r90 top (schematic designator R11)
R11_CIN4 "10R" AXIAL0.4 30910.98,9967 r90 top (schematic designator R11)
R11_CIN5 "10R" AXIAL0.4 30910.98,11195 r90 top (schematic designator R11)
R11_CIN6 "10R" AXIAL0.4 30910.98,12423 r90 top (schematic designator R11)
R11_CIN7 "10R" AXIAL0.4 30910.98,13651 r90 top (schematic designator R11)
R11_CIN8 "10R" AXIAL0.4 30910.98,14879 r90 top (schematic designator R11)
R12_CIN1 "10R" AXIAL0.4 29554.35,6283 r90 top (schematic designator R12)
R12_CIN2 "10R" AXIAL0.4 29873.25,7511 r90 top (schematic designator R12)
R12_CIN3 "10R" AXIAL0.4 29873.25,8739 r90 top (schematic designator R12)
R12_CIN4 "10R" AXIAL0.4 29873.25,9967 r90 top (schematic designator R12)
R12_CIN5 "10R" AXIAL0.4 29873.25,11195 r90 top (schematic designator R12)
R12_CIN6 "10R" AXIAL0.4 29873.25,12423 r90 top (schematic designator R12)
R12_CIN7 "10R" AXIAL0.4 29873.25,13651 r90 top (schematic designator R12)
R12_CIN8 "10R" AXIAL0.4 29873.25,14879 r90 top (schematic designator R12)
R13 "10R" AXIAL0.4 22149.84,16107 r90 top
R14 "10R" AXIAL0.4 22149.84,3995 r90 top
R15_COUT1 "10R" AXIAL0.4 24205.73,17335 r90 top (schematic designator R15)
R15_COUT2 "10R" AXIAL0.4 24365.68,18563 r90 top (schematic designator R15)
R16 "15k" AXIAL0.4 24599.71,2767 r90 top
R17 "15k" AXIAL0.4 26165.61,2767 r90 top
R18 "15k" AXIAL0.4 24853.66,2767 r90 top
R19 "15k" AXIAL0.4 26419.56,2767 r90 top
R20_CIN1 "15k" AXIAL0.4 44006.56,6283 r90 top (schematic designator R20)
R20_CIN2 "15k" AXIAL0.4 44770.17,7511 r90 top (schematic designator R20)
R20_CIN3 "15k" AXIAL0.4 44770.17,8739 r90 top (schematic designator R20)
R20_CIN4 "15k" AXIAL0.4 44770.17,9967 r90 top (schematic designator R20)
R20_CIN5 "15k" AXIAL0.4 44770.17,11195 r90 top (schematic designator R20)
R20_CIN6 "15k" AXIAL0.4 44770.17,12423 r90 top (schematic designator R20)
R20_CIN7 "15k" AXIAL0.4 44770.17,13651 r90 top (schematic designator R20)
R20_CIN8 "15k" AXIAL0.4 44770.17,14879 r90 top (schematic designator R20)
R21_CIN1 "15k" AXIAL0.4 44540.42,6283 r90 top (schematic designator R21)
R21_CIN2 "15k" AXIAL0.4 45324.02,7511 r90 top (schematic designator R21)
R21_CIN3 "15k" AXIAL0.4 45324.02,8739 r90 top (schematic designator R21)
R21_CIN4 "15k" AXIAL0.4 45324.02,9967 r90 top (schematic designator R21)
R21_CIN5 "15k" AXIAL0.4 45324.02,11195 r90 top (schematic designator R21)
R21_CIN6 "15k" AXIAL0.4 45324.02,12423 r90 top (schematic designator R21)
R21_CIN7 "15k" AXIAL0.4 45324.02,13651 r90 top (schematic designator R21)
R21_CIN8 "15k" AXIAL0.4 45324.02,14879 r90 top (schematic designator R21)
R22_CIN1 "15k" AXIAL0.4 46691.15,6283 r90 top (schematic designator R22)
R22_CIN2 "15k" AXIAL0.4 47514.74,7511 r90 top (schematic designator R22)
R22_CIN3 "15k" AXIAL0.4 47514.74,8739 r90 top (schematic designator R22)
R22_CIN4 "15k" AXIAL0.4 47514.74,9967 r90 top (schematic designator R22)
R22_CIN5 "15k" AXIAL0.4 47514.74,11195 r90 top (schematic designator R22)
R22_CIN6 "15k" AXIAL0.4 47514.74,12423 r90 top (schematic designator R22)
R22_CIN7 "15k" AXIAL0.4 47514.74,13651 r90 top (schematic designator R22)
R22_CIN8 "15k" AXIAL0.4 47514.74,14879 r90 top (schematic designator R22)
R23_CIN1 "15k" AXIAL0.4 47225.01,6283 r90 top (schematic designator R23)
R23_CIN2 "15k" AXIAL0.4 48068.59,7511 r90 top (schematic designator R23)
R23_CIN3 "15k" AXIAL0.4 48068.59,8739 r90 top (schematic designator R23)
R23_CIN4 "15k" AXIAL0.4 48068.59,9967 r90 top (schematic designator R23)
R23_CIN5 "15k" AXIAL0.4 48068.59,11195 r90 top (schematic designator R23)
R23_CIN6 "15k" AXIAL0.4 48068.59,12423 r90 top (schematic designator R23)
R23_CIN7 "15k" AXIAL0.4 48068.59,13651 r90 top (schematic designator R23)
R23_CIN8 "15k" AXIAL0.4 48068.59,14879 r90 top (schematic designator R23)
R24 "2.2k" AXIAL0.4 23314.86,2767 r90 top
R25_CIN1 "2.2k" AXIAL0.4 20006.09,6283 r90 top (schematic designator R25)
R25_CIN2 "2.2k" AXIAL0.4 20046.08,7511 r90 top (schematic designator R25)
R25_CIN3 "2.2k" AXIAL0.4 20046.08,8739 r90 top (schematic designator R25)
R25_CIN4 "2.2k" AXIAL0.4 20046.08,9967 r90 top (schematic designator R25)
R25_CIN5 "2.2k" AXIAL0.4 20046.08,11195 r90 top (schematic designator R25)
R25_CIN6 "2.2k" AXIAL0.4 20046.08,12423 r90 top (schematic designator R25)
R25_CIN7 "2.2k" AXIAL0.4 20046.08,13651 r90 top (schematic designator R25)
R25_CIN8 "2.2k" AXIAL0.4 20046.08,14879 r90 top (schematic designator R25)
R26_CIN1 "2.2k" AXIAL0.4 20539.95,6283 r90 top (schematic designator R26)
R26_CIN2 "2.2k" AXIAL0.4 20599.93,7511 r90 top (schematic designator R26)
R26_CIN3 "2.2k" AXIAL0.4 20599.93,8739 r90 top (schematic designator R26)
R26_CIN4 "2.2k" AXIAL0.4 20599.93,9967 r90 top (schematic designator R26)
R26_CIN5 "2.2k" AXIAL0.4 20599.93,11195 r90 top (schematic designator R26)
R26_CIN6 "2.2k" AXIAL0.4 20599.93,12423 r90 top (schematic designator R26)
R26_CIN7 "2.2k" AXIAL0.4 20599.93,13651 r90 top (schematic designator R26)
R26_CIN8 "2.2k" AXIAL0.4 20599.93,14879 r90 top (schematic designator R26)
R27_CIN1 "2.2k" AXIAL0.4 32692.55,6283 r90 top (schematic designator R27)
R27_CIN2 "2.2k" AXIAL0.4 33131.41,7511 r90 top (schematic designator R27)
R27_CIN3 "2.2k" AXIAL0.4 33131.41,8739 r90 top (schematic designator R27)
R27_CIN4 "2.2k" AXIAL0.4 33131.41,9967 r90 top (schematic designator R27)
R27_CIN5 "2.2k" AXIAL0.4 33131.41,11195 r90 top (schematic designator R27)
R27_CIN6 "2.2k" AXIAL0.4 33131.41,12423 r90 top (schematic designator R27)
R27_CIN7 "2.2k" AXIAL0.4 33131.41,13651 r90 top (schematic designator R27)
R27_CIN8 "2.2k" AXIAL0.4 33131.41,14879 r90 top (schematic designator R27)
R28_CIN1 "2.2k" AXIAL0.4 31065.96,6283 r90 top (schematic designator R28)
R28_CIN2 "2.2k" AXIAL0.4 31444.85,7511 r90 top (schematic designator R28)
R28_CIN3 "2.2k" AXIAL0.4 31444.85,8739 r90 top (schematic designator R28)
R28_CIN4 "2.2k" AXIAL0.4 31444.85,9967 r90 top (schematic designator R28)
R28_CIN5 "2.2k" AXIAL0.4 31444.85,11195 r90 top (schematic designator R28)
R28_CIN6 "2.2k" AXIAL0.4 31444.85,12423 r90 top (schematic designator R28)
R28_CIN7 "2.2k" AXIAL0.4 31444.85,13651 r90 top (schematic designator R28)
R28_CIN8 "2.2k" AXIAL0.4 31444.85,14879 r90 top (schematic designator R28)
R29 "2.2k" AXIAL0.4 18479,16107 r90 top
R30 "2.2k" AXIAL0.4 22403.8,16107 r90 top
R31 "2.2k" AXIAL0.4 22667.74,16107 r90 top
R32 "2.2k" AXIAL0.4 23190.65,16107 r90 top
R33 "2.2k" AXIAL0.4 18500,3975 r90 top
R34 "2.2k" AXIAL0.4 22403.8,3995 r90 top
R35 "2.2k" AXIAL0.4 22667.74,3995 r90 top
R36 "2.2k" AXIAL0.4 23230.64,3995 r90 top
R37_COUT1 "2.2k" AXIAL0.4 18479,17335 r90 top (schematic designator R37)
R37_COUT2 "2.2k" AXIAL0.4 18479,18563 r90 top (schematic designator R37)
R38_COUT1 "2.2k" AXIAL0.4 25343.43,17335 r90 top (schematic designator R38)
R38_COUT2 "2.2k" AXIAL0.4 25543.37,18563 r90 top (schematic designator R38)
R39 "6.8k" AXIAL0.4 23877.76,2767 r90 top
R40_CIN1 "6.8k" AXIAL0.4 33692.29,6283 r90 top (schematic designator R40)
R40_CIN2 "6.8k" AXIAL0.4 34190.14,7511 r90 top (schematic designator R40)
R40_CIN3 "6.8k" AXIAL0.4 34190.14,8739 r90 top (schematic designator R40)
R40_CIN4 "6.8k" AXIAL0.4 34190.14,9967 r90 top (schematic designator R40)
R40_CIN5 "6.8k" AXIAL0.4 34190.14,11195 r90 top (schematic designator R40)
R40_CIN6 "6.8k" AXIAL0.4 34190.14,12423 r90 top (schematic designator R40)
R40_CIN7 "6.8k" AXIAL0.4 34190.14,13651 r90 top (schematic designator R40)
R40_CIN8 "6.8k" AXIAL0.4 34190.14,14879 r90 top (schematic designator R40)
R41_CIN1 "6.8k" AXIAL0.4 31599.82,6283 r90 top (schematic designator R41)
R41_CIN2 "6.8k" AXIAL0.4 31998.7,7511 r90 top (schematic designator R41)
R41_CIN3 "6.8k" AXIAL0.4 31998.7,8739 r90 top (schematic designator R41)
R41_CIN4 "6.8k" AXIAL0.4 31998.7,9967 r90 top (schematic designator R41)
R41_CIN5 "6.8k" AXIAL0.4 31998.7,11195 r90 top (schematic designator R41)
R41_CIN6 "6.8k" AXIAL0.4 31998.7,12423 r90 top (schematic designator R41)
R41_CIN7 "6.8k" AXIAL0.4 31998.7,13651 r90 top (schematic designator R41)
R41_CIN8 "6.8k" AXIAL0.4 31998.7,14879 r90 top (schematic designator R41)
R42_COUT1 "6.8k" AXIAL0.4 26586.11,17335 r90 top (schematic designator R42)
R42_COUT2 "6.8k" AXIAL0.4 26826.03,18563 r90 top (schematic designator R42)
R43_CIN1 "330R" AXIAL0.4 22710.4,6283 r90 top (schematic designator R43)
R43_CIN2 "330R" AXIAL0.4 22850.35,7511 r90 top (schematic designator R43)
R43_CIN3 "330R" AXIAL0.4 22850.35,8739 r90 top (schematic designator R43)
R43_CIN4 "330R" AXIAL0.4 22850.35,9967 r90 top (schematic designator R43)
R43_CIN5 "330R" AXIAL0.4 22850.35,11195 r90 top (schematic designator R43)
R43_CIN6 "330R" AXIAL0.4 22850.35,12423 r90 top (schematic designator R43)
R43_CIN7 "330R" AXIAL0.4 22850.35,13651 r90 top (schematic designator R43)
R43_CIN8 "330R" AXIAL0.4 22850.35,14879 r90 top (schematic designator R43)
R44_COUT1 "330R" AXIAL0.4 30529.14,17335 r90 top (schematic designator R44)
R44_COUT2 "330R" AXIAL0.4 30889.02,18563 r90 top (schematic designator R44)
R45_CIN1 "4.7k" AXIAL0.4 23710.14,6283 r90 top (schematic designator R45)
R45_CIN2 "4.7k" AXIAL0.4 23909.08,7511 r90 top (schematic designator R45)
R45_CIN3 "4.7k" AXIAL0.4 23909.08,8739 r90 top (schematic designator R45)
R45_CIN4 "4.7k" AXIAL0.4 23909.08,9967 r90 top (schematic designator R45)
R45_CIN5 "4.7k" AXIAL0.4 23909.08,11195 r90 top (schematic designator R45)
R45_CIN6 "4.7k" AXIAL0.4 23909.08,12423 r90 top (schematic designator R45)
R45_CIN7 "4.7k" AXIAL0.4 23909.08,13651 r90 top (schematic designator R45)
R45_CIN8 "4.7k" AXIAL0.4 23909.08,14879 r90 top (schematic designator R45)
R46_CIN1 "4.7k" AXIAL0.4 36646.61,6283 r90 top (schematic designator R46)
R46_CIN2 "4.7k" AXIAL0.4 37244.43,7511 r90 top (schematic designator R46)
R46_CIN3 "4.7k" AXIAL0.4 37244.43,8739 r90 top (schematic designator R46)
R46_CIN4 "4.7k" AXIAL0.4 37244.43,9967 r90 top (schematic designator R46)
R46_CIN5 "4.7k" AXIAL0.4 37244.43,11195 r90 top (schematic designator R46)
R46_CIN6 "4.7k" AXIAL0.4 37244.43,12423 r90 top (schematic designator R46)
R46_CIN7 "4.7k" AXIAL0.4 37244.43,13651 r90 top (schematic designator R46)
R46_CIN8 "4.7k" AXIAL0.4 37244.43,14879 r90 top (schematic designator R46)
R47_CIN1 "4.7k" AXIAL0.4 43472.7,6283 r90 top (schematic designator R47)
R47_CIN2 "4.7k" AXIAL0.4 44216.32,7511 r90 top (schematic designator R47)
R47_CIN3 "4.7k" AXIAL0.4 44216.32,8739 r90 top (schematic designator R47)
R47_CIN4 "4.7k" AXIAL0.4 44216.32,9967 r90 top (schematic designator R47)
R47_CIN5 "4.7k" AXIAL0.4 44216.32,11195 r90 top (schematic designator R47)
R47_CIN6 "4.7k" AXIAL0.4 44216.32,12423 r90 top (schematic designator R47)
R47_CIN7 "4.7k" AXIAL0.4 44216.32,13651 r90 top (schematic designator R47)
R47_CIN8 "4.7k" AXIAL0.4 44216.32,14879 r90 top (schematic designator R47)
R48_CIN1 "10k" AXIAL0.4 21073.81,6283 r90 top (schematic designator R48)
R48_CIN2 "10k" AXIAL0.4 21153.79,7511 r90 top (schematic designator R48)
R48_CIN3 "10k" AXIAL0.4 21153.79,8739 r90 top (schematic designator R48)
R48_CIN4 "10k" AXIAL0.4 21153.79,9967 r90 top (schematic designator R48)
R48_CIN5 "10k" AXIAL0.4 21153.79,11195 r90 top (schematic designator R48)
R48_CIN6 "10k" AXIAL0.4 21153.79,12423 r90 top (schematic designator R48)
R48_CIN7 "10k" AXIAL0.4 21153.79,13651 r90 top (schematic designator R48)
R48_CIN8 "10k" AXIAL0.4 21153.79,14879 r90 top (schematic designator R48)
R49_CIN1 "10k" AXIAL0.4 21607.67,6283 r90 top (schematic designator R49)
R49_CIN2 "10k" AXIAL0.4 21707.64,7511 r90 top (schematic designator R49)
R49_CIN3 "10k" AXIAL0.4 21707.64,8739 r90 top (schematic designator R49)
R49_CIN4 "10k" AXIAL0.4 21707.64,9967 r90 top (schematic designator R49)
R49_CIN5 "10k" AXIAL0.4 21707.64,11195 r90 top (schematic designator R49)
R49_CIN6 "10k" AXIAL0.4 21707.64,12423 r90 top (schematic designator R49)
R49_CIN7 "10k" AXIAL0.4 21707.64,13651 r90 top (schematic designator R49)
R49_CIN8 "10k" AXIAL0.4 21707.64,14879 r90 top (schematic designator R49)
R50_CIN1 "10k" AXIAL0.4 35478.87,6283 r90 top (schematic designator R50)
R50_CIN2 "10k" AXIAL0.4 36036.71,7511 r90 top (schematic designator R50)
R50_CIN3 "10k" AXIAL0.4 36036.71,8739 r90 top (schematic designator R50)
R50_CIN4 "10k" AXIAL0.4 36036.71,9967 r90 top (schematic designator R50)
R50_CIN5 "10k" AXIAL0.4 36036.71,11195 r90 top (schematic designator R50)
R50_CIN6 "10k" AXIAL0.4 36036.71,12423 r90 top (schematic designator R50)
R50_CIN7 "10k" AXIAL0.4 36036.71,13651 r90 top (schematic designator R50)
R50_CIN8 "10k" AXIAL0.4 36036.71,14879 r90 top (schematic designator R50)
R51_CIN1 "10k" AXIAL0.4 47758.87,6283 r90 top (schematic designator R51)
R51_CIN2 "10k" AXIAL0.4 48622.44,7511 r90 top (schematic designator R51)
R51_CIN3 "10k" AXIAL0.4 48622.44,8739 r90 top (schematic designator R51)
R51_CIN4 "10k" AXIAL0.4 48622.44,9967 r90 top (schematic designator R51)
R51_CIN5 "10k" AXIAL0.4 48622.44,11195 r90 top (schematic designator R51)
R51_CIN6 "10k" AXIAL0.4 48622.44,12423 r90 top (schematic designator R51)
R51_CIN7 "10k" AXIAL0.4 48622.44,13651 r90 top (schematic designator R51)
R51_CIN8 "10k" AXIAL0.4 48622.44,14879 r90 top (schematic designator R51)
R52 "10k" AXIAL0.4 19529,5055 r90 top
R53 "10k" AXIAL0.4 21439.81,5055 r90 top
R54 "10k" AXIAL0.4 21703.76,5055 r90 top
R55_COUT1 "10k" AXIAL0.4 27793.78,17335 r90 top (schematic designator R55)
R55_COUT2 "10k" AXIAL0.4 28073.69,18563 r90 top (schematic designator R55)
R56_COUT1 "10k" AXIAL0.4 33506.35,17335 r90 top (schematic designator R56)
R56_COUT2 "10k" AXIAL0.4 33966.21,18563 r90 top (schematic designator R56)
R57 "68k" AXIAL0.4 18732.95,16107 r90 top
R58 "68k" AXIAL0.4 18732.95,3995 r90 top
R59 "68k" AXIAL0.4 20717.86,5055 r90 top
R60_COUT1 "68k" AXIAL0.4 19072.84,17335 r90 top (schematic designator R60)
R60_COUT2 "68k" AXIAL0.4 19092.83,18563 r90 top (schematic designator R60)
R61 "100R" AXIAL0.4 23454.6,16107 r90 top
R62 "100R" AXIAL0.4 23494.59,3995 r90 top
R63_COUT1 "100R" AXIAL0.4 27189.94,17335 r90 top (schematic designator R63)
R63_COUT2 "100R" AXIAL0.4 27449.86,18563 r90 top (schematic designator R63)
R64_COUT1 "100R" AXIAL0.4 29161.46,17335 r90 top (schematic designator R64)
R64_COUT2 "100R" AXIAL0.4 29481.36,18563 r90 top (schematic designator R64)
R65_COUT1 "100R" AXIAL0.4 34874.03,17335 r90 top (schematic designator R65)
R65_COUT2 "100R" AXIAL0.4 35373.87,18563 r90 top (schematic designator R65)
R66 "33R" AXIAL0.4 22747.62,5055 r90 top
R67 "33R" AXIAL0.4 23011.57,5055 r90 top
R68 "68R" AXIAL0.4 23275.51,5055 r90 top
R69_COUT1 "270R 1W" AXIAL0.4 36241.71,17335 r90 top (schematic designator R69)
R69_COUT2 "270R 1W" AXIAL0.4 36781.53,18563 r90 top (schematic designator R69)
R70_COUT1 "680R" AXIAL0.4 31687.83,17335 r90 top (schematic designator R70)
R70_COUT2 "680R" AXIAL0.4 32087.7,18563 r90 top (schematic designator R70)
S1_CIN1 "SW SPDT" SW-SPDT 24962.86,6385 r90 top (schematic designator S1)
S1_CIN2 "SW SPDT" SW-SPDT 25201.79,7613 r90 top (schematic designator S1)
S1_CIN3 "SW SPDT" SW-SPDT 25201.79,8841 r90 top (schematic designator S1)
S1_CIN4 "SW SPDT" SW-SPDT 25201.79,10069 r90 top (schematic designator S1)
S1_CIN5 "SW SPDT" SW-SPDT 25201.79,11297 r90 top (schematic designator S1)
S1_CIN6 "SW SPDT" SW-SPDT 25201.79,12525 r90 top (schematic designator S1)
S1_CIN7 "SW SPDT" SW-SPDT 25201.79,13753 r90 top (schematic designator S1)
S1_CIN8 "SW SPDT" SW-SPDT 25201.79,14981 r90 top (schematic designator S1)
S2 "SW-12WAY" SW-12WAY 18950,4975 r0 top
S3 "Power" SW-MAINS 20818.95,21223 r90 top
T1 "30V CT" TRANSFORMER 22601.95,19553 r90 top
U1 "LM833M" DIP8 19994.94,3133.02 r0 top
U2_CIN1 "LM833M" DIP8 33218.41,6649.02 r0 top (schematic designator U2)
U2_CIN2 "LM833M" DIP8 33696.27,7611 r90 top (schematic designator U2)
U2_CIN3 "LM833M" DIP8 33696.27,8839 r90 top (schematic designator U2)
U2_CIN4 "LM833M" DIP8 33696.27,10067 r90 top (schematic designator U2)
U2_CIN5 "LM833M" DIP8 33696.27,11295 r90 top (schematic designator U2)
U2_CIN6 "LM833M" DIP8 33696.27,12523 r90 top (schematic designator U2)
U2_CIN7 "LM833M" DIP8 33696.27,13751 r90 top (schematic designator U2)
U2_CIN8 "LM833M" DIP8 33696.27,14979 r90 top (schematic designator U2)
U3 "LM833M" DIP8 19287.84,4361.02 r0 top
U4_COUT1 "LM833M" DIP8 20326.51,17435 r90 top (schematic designator U4)
U4_COUT2 "LM833M" DIP8 20386.5,18663 r90 top (schematic designator U4)
U5_COUT1 "LM833M" DIP8 31143.97,17435 r90 top (schematic designator U5)
U5_COUT2 "LM833M" DIP8 31523.85,18663 r90 top (schematic designator U5)
U6_CIN1 "SSM2017P (8)" DIP8 23236.26,6649.02 r0 top (schematic designator U6)
U6_CIN2 "SSM2017P (8)" DIP8 23415.2,7611 r90 top (schematic designator U6)
U6_CIN3 "SSM2017P (8)" DIP8 23415.2,8839 r90 top (schematic designator U6)
U6_CIN4 "SSM2017P (8)" DIP8 23415.2,10067 r90 top (schematic designator U6)
U6_CIN5 "SSM2017P (8)" DIP8 23415.2,11295 r90 top (schematic designator U6)
U6_CIN6 "SSM2017P (8)" DIP8 23415.2,12523 r90 top (schematic designator U6)
U6_CIN7 "SSM2017P (8)" DIP8 23415.2,13751 r90 top (schematic designator U6)
U6_CIN8 "SSM2017P (8)" DIP8 23415.2,14979 r90 top (schematic designator U6)
U7_CIN1 "OP27C" DIP8 48274.73,6649.02 r0 top (schematic designator U7)
U7_CIN2 "OP27C" DIP8 49177.3,7611 r90 top (schematic designator U7)
U7_CIN3 "OP27C" DIP8 49177.3,8839 r90 top (schematic designator U7)
U7_CIN4 "OP27C" DIP8 49177.3,10067 r90 top (schematic designator U7)
U7_CIN5 "OP27C" DIP8 49177.3,11295 r90 top (schematic designator U7)
U7_CIN6 "OP27C" DIP8 49177.3,12523 r90 top (schematic designator U7)
U7_CIN7 "OP27C" DIP8 49177.3,13751 r90 top (schematic designator U7)
U7_CIN8 "OP27C" DIP8 49177.3,14979 r90 top (schematic designator U7)
U8 "LM833M" DIP8 19287.84,16473.02 r0 top
U9 "TL071" DIP8 19988.92,5421.02 r0 top
U10 "78L15" TO-92A 25791.82,21913 r90 top
U11 "79L15" TO-92A 26045.77,21913 r90 top
U12_COUT1 "LM3915N(18)" DIP18 32912.51,17701.02 r0 top (schematic designator U12)
U12_COUT2 "LM3915N(18)" DIP18 33352.37,18929.02 r0 top (schematic designator U12)
VR1 "10k LOG" "POT - 24MM" 21800.94,2699 r0 top
VR2_CIN1 "10k LOG" "POT - 24MM" 28322.47,6215 r0 top (schematic designator VR2)
VR2_CIN2 "10k LOG" "POT - 24MM" 28621.38,7443 r0 top (schematic designator VR2)
VR2_CIN3 "10k LOG" "POT - 24MM" 28621.38,8671 r0 top (schematic designator VR2)
VR2_CIN4 "10k LOG" "POT - 24MM" 28621.38,9899 r0 top (schematic designator VR2)
VR2_CIN5 "10k LOG" "POT - 24MM" 28621.38,11127 r0 top (schematic designator VR2)
VR2_CIN6 "10k LOG" "POT - 24MM" 28621.38,12355 r0 top (schematic designator VR2)
VR2_CIN7 "10k LOG" "POT - 24MM" 28621.38,13583 r0 top (schematic designator VR2)
VR2_CIN8 "10k LOG" "POT - 24MM" 28621.38,14811 r0 top (schematic designator VR2)
VR3_CIN1 "10k LOG" "POT - 24MM" 26580.6,6215 r0 top (schematic designator VR3)
VR3_CIN2 "10k LOG" "POT - 24MM" 26859.52,7443 r0 top (schematic designator VR3)
VR3_CIN3 "10k LOG" "POT - 24MM" 26859.52,8671 r0 top (schematic designator VR3)
VR3_CIN4 "10k LOG" "POT - 24MM" 26859.52,9899 r0 top (schematic designator VR3)
VR3_CIN5 "10k LOG" "POT - 24MM" 26859.52,11127 r0 top (schematic designator VR3)
VR3_CIN6 "10k LOG" "POT - 24MM" 26859.52,12355 r0 top (schematic designator VR3)
VR3_CIN7 "10k LOG" "POT - 24MM" 26859.52,13583 r0 top (schematic designator VR3)
VR3_CIN8 "10k LOG" "POT - 24MM" 26859.52,14811 r0 top (schematic designator VR3)
VR4_CIN1 "10k LOG" "POT - 24MM" 42874.7,6215 r0 top (schematic designator VR4)
VR4_CIN2 "10k LOG" "POT - 24MM" 43618.32,7443 r0 top (schematic designator VR4)
VR4_CIN3 "10k LOG" "POT - 24MM" 43618.32,8671 r0 top (schematic designator VR4)
VR4_CIN4 "10k LOG" "POT - 24MM" 43618.32,9899 r0 top (schematic designator VR4)
VR4_CIN5 "10k LOG" "POT - 24MM" 43618.32,11127 r0 top (schematic designator VR4)
VR4_CIN6 "10k LOG" "POT - 24MM" 43618.32,12355 r0 top (schematic designator VR4)
VR4_CIN7 "10k LOG" "POT - 24MM" 43618.32,13583 r0 top (schematic designator VR4)
VR4_CIN8 "10k LOG" "POT - 24MM" 43618.32,14811 r0 top (schematic designator VR4)
VR5 "10k LOG" "POT - 24MM" 21093.84,16039 r0 top
VR6 "10k LOG" "POT - 24MM" 21093.84,3927 r0 top
VR7_COUT1 "10k LOG" "POT - 24MM" 22848.05,17267 r0 top (schematic designator VR7)
VR7_COUT2 "10k LOG" "POT - 24MM" 22968.01,18495 r0 top (schematic designator VR7)
VR8 "10k LIN" "POT - 24MM" 25567.61,2699 r0 top
VR9_CIN1 "10k LIN" "POT - 24MM" 45524.29,6215 r0 top (schematic designator VR9)
VR9_CIN2 "10k LIN" "POT - 24MM" 46327.88,7443 r0 top (schematic designator VR9)
VR9_CIN3 "10k LIN" "POT - 24MM" 46327.88,8671 r0 top (schematic designator VR9)
VR9_CIN4 "10k LIN" "POT - 24MM" 46327.88,9899 r0 top (schematic designator VR9)
VR9_CIN5 "10k LIN" "POT - 24MM" 46327.88,11127 r0 top (schematic designator VR9)
VR9_CIN6 "10k LIN" "POT - 24MM" 46327.88,12355 r0 top (schematic designator VR9)
VR9_CIN7 "10k LIN" "POT - 24MM" 46327.88,13583 r0 top (schematic designator VR9)
VR9_CIN8 "10k LIN" "POT - 24MM" 46327.88,14811 r0 top (schematic designator VR9)
VR10_CIN1 "100k LIN" "POT - 24MM" 38673.22,6215 r0 top (schematic designator VR10)
VR10_CIN2 "100k LIN" "POT - 24MM" 39331.02,7443 r0 top (schematic designator VR10)
VR10_CIN3 "100k LIN" "POT - 24MM" 39331.02,8671 r0 top (schematic designator VR10)
VR10_CIN4 "100k LIN" "POT - 24MM" 39331.02,9899 r0 top (schematic designator VR10)
VR10_CIN5 "100k LIN" "POT - 24MM" 39331.02,11127 r0 top (schematic designator VR10)
VR10_CIN6 "100k LIN" "POT - 24MM" 39331.02,12355 r0 top (schematic designator VR10)
VR10_CIN7 "100k LIN" "POT - 24MM" 39331.02,13583 r0 top (schematic designator VR10)
VR10_CIN8 "100k LIN" "POT - 24MM" 39331.02,14811 r0 top (schematic designator VR10)
VR11_CIN1 "20k LIN" "POT - 24MM" 39731.22,6215 r0 top (schematic designator VR11)
VR11_CIN2 "20k LIN" "POT - 24MM" 40394.86,7443 r0 top (schematic designator VR11)
VR11_CIN3 "20k LIN" "POT - 24MM" 40394.86,8671 r0 top (schematic designator VR11)
VR11_CIN4 "20k LIN" "POT - 24MM" 40394.86,9899 r0 top (schematic designator VR11)
VR11_CIN5 "20k LIN" "POT - 24MM" 40394.86,11127 r0 top (schematic designator VR11)
VR11_CIN6 "20k LIN" "POT - 24MM" 40394.86,12355 r0 top (schematic designator VR11)
VR11_CIN7 "20k LIN" "POT - 24MM" 40394.86,13583 r0 top (schematic designator VR11)
VR11_CIN8 "20k LIN" "POT - 24MM" 40394.86,14811 r0 top (schematic designator VR11)

## Footprints (in the part's own frame and the unit in brackets; to place one, negate y for a bottom-side part, rotate by r counter-clockwise, add the part's x,y. Pads: shape width x height; smd on the part's side, far side on the other; paste and mask are expansions set on the pad)
AXIAL0.4 [mil]
  round 62 hole 32: 1(0,0) 2(400,0)
  silkscreen extent 40,-40 360,40
DIODE0.4 [mil]
  round 62 hole 32: 1(0,0) 2(400,0)
  silkscreen extent 40,-40 360,40
DIODE0.5 [mil]
  round 70 hole 40: 1(0,0) 2(500,0)
  silkscreen extent 60,-55 440,55
DIP8 [mil]
  rect 50x50 hole 32: 1(0,0)
  round 50 hole 32: 2(0,-100) 3(0,-200) 4(0,-300) 5(300,-300) 6(300,-200) 7(300,-100) 8(300,0)
  silkscreen extent 50,-350 250,50
DIP18 [mil]
  rect 50x50 hole 32: 1(0,0)
  round 50 hole 32: 2(0,-100) 3(0,-200) 4(0,-300) 5(0,-400) 6(0,-500) 7(0,-600) 8(0,-700) 9(0,-800) 10(300,-800) 11(300,-700) 12(300,-600) 13(300,-500) 14(300,-400) 15(300,-300) 16(300,-200) 17(300,-100) 18(300,0)
  silkscreen extent 50,-850 250,50